# Altium PCB PCB1.PcbDoc
Units mm, origin at the board's own origin, x right, y up, seen from the top; angles counter-clockwise.
Board outline 20.16 x 24.36 mm, 12 copper layers (Top Layer, Mid-Layer 1, Mid-Layer 2, Mid-Layer 3, Mid-Layer 4, Mid-Layer 5, Mid-Layer 6, Mid-Layer 7, Mid-Layer 8, Mid-Layer 9, Mid-Layer 10, Bottom Layer), stack 2.187 mm thick; 1 components, 1 nets, 6 pads, 165 vias.
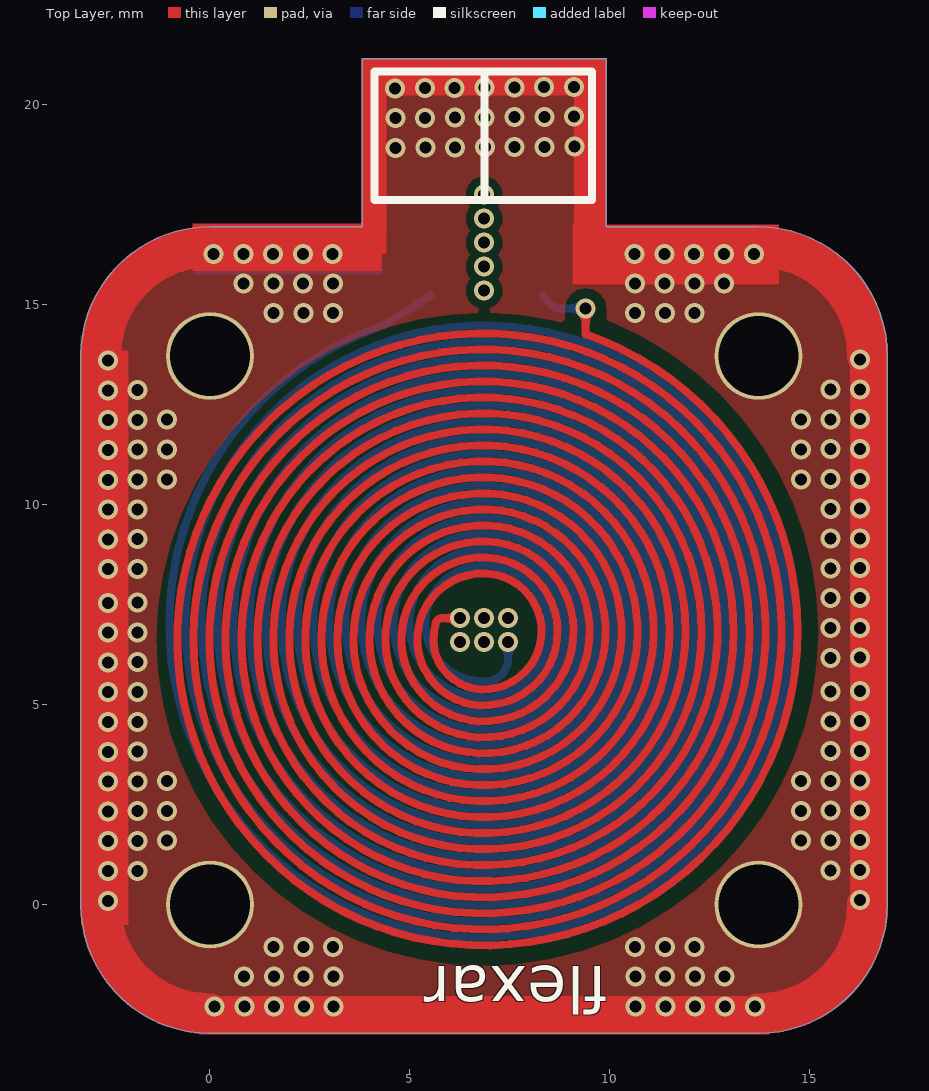
[diagram p0: Top Layer view]
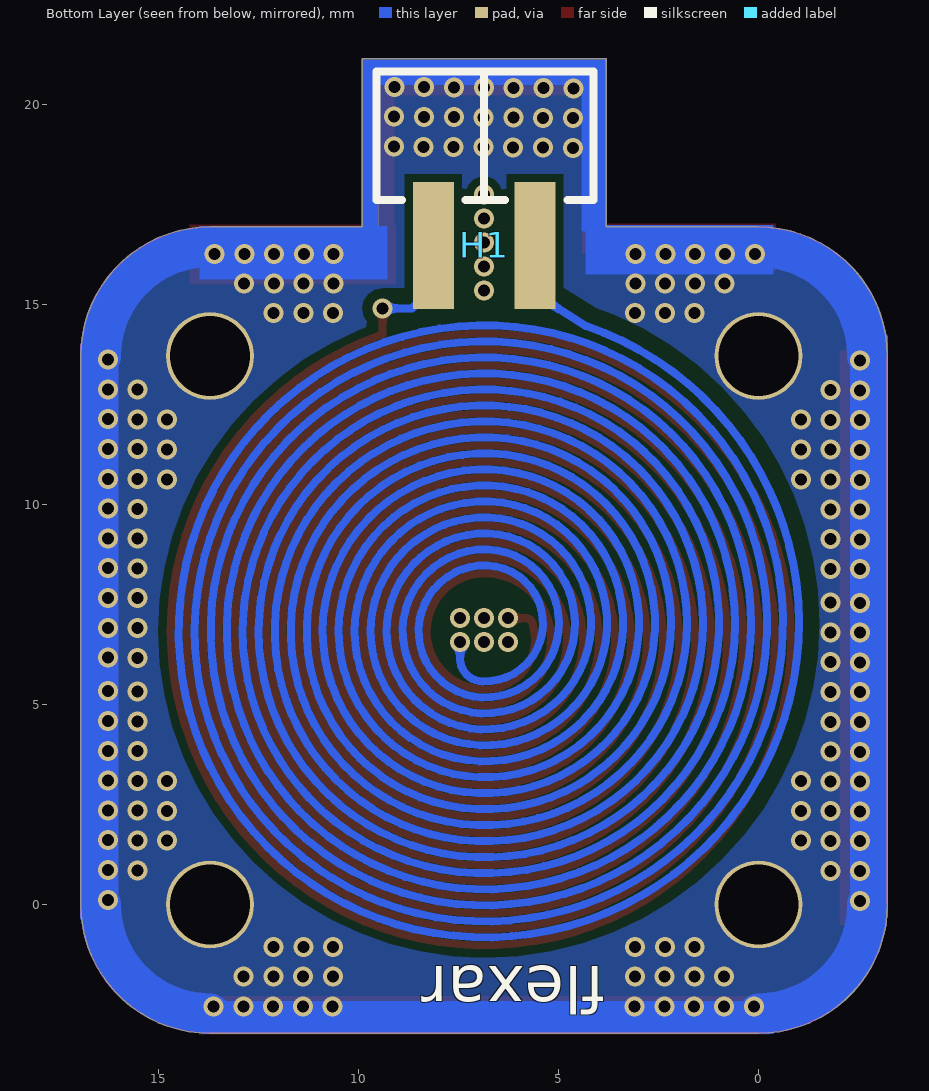
[diagram p1: Bottom Layer view, seen from below]
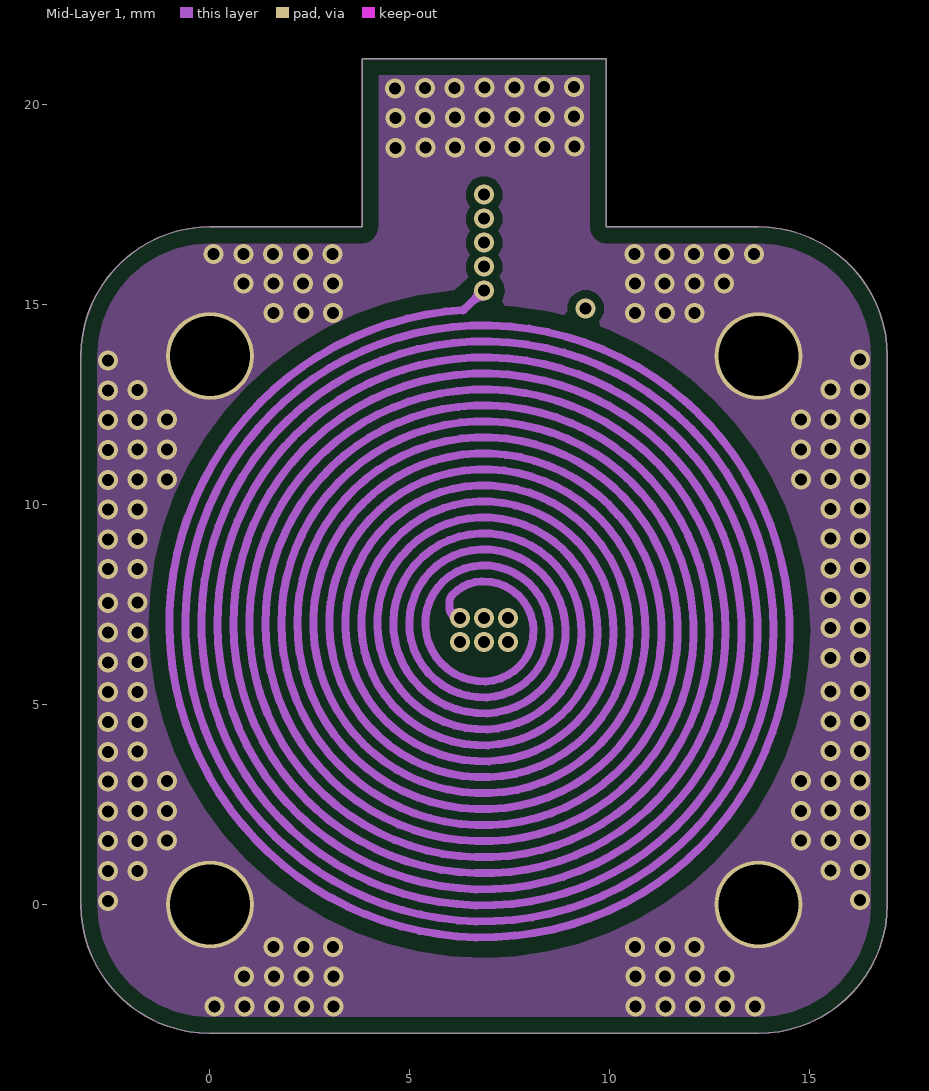
[diagram p2: Mid-Layer 1]
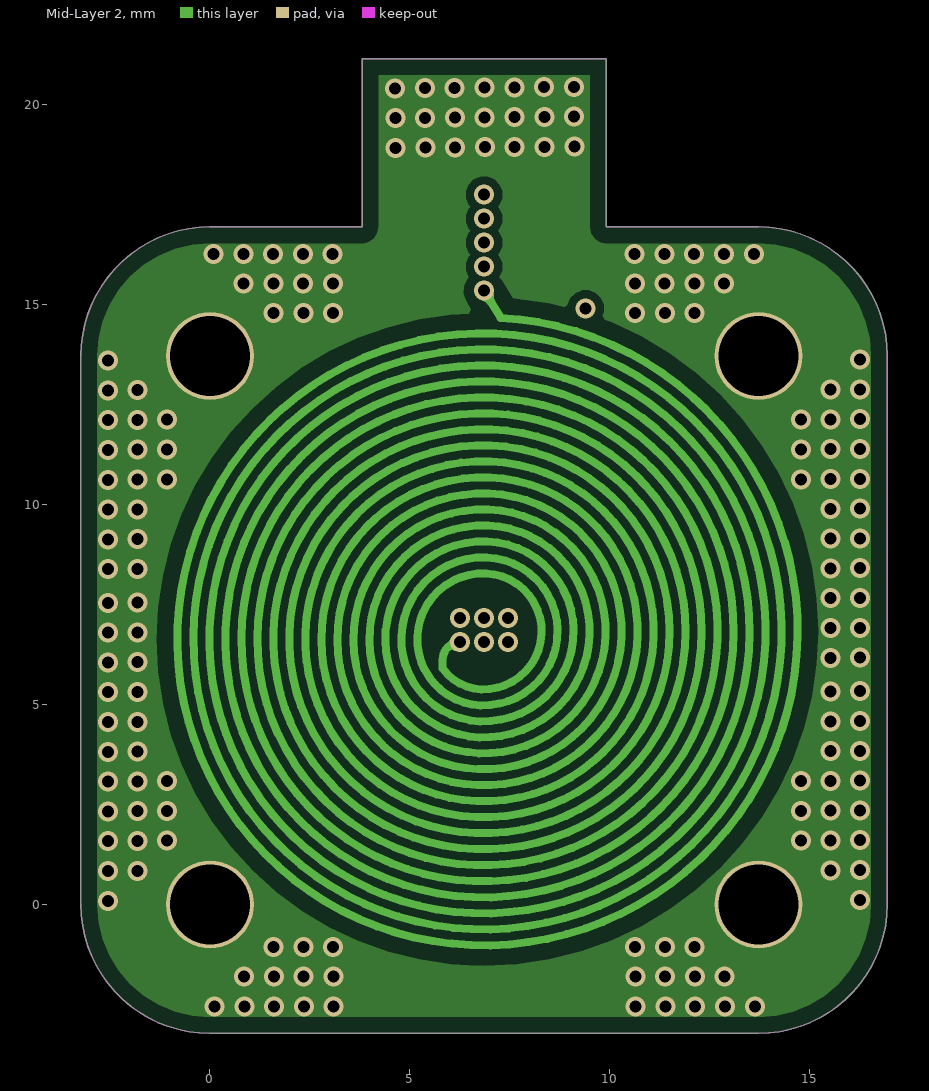
[diagram p3: Mid-Layer 2]
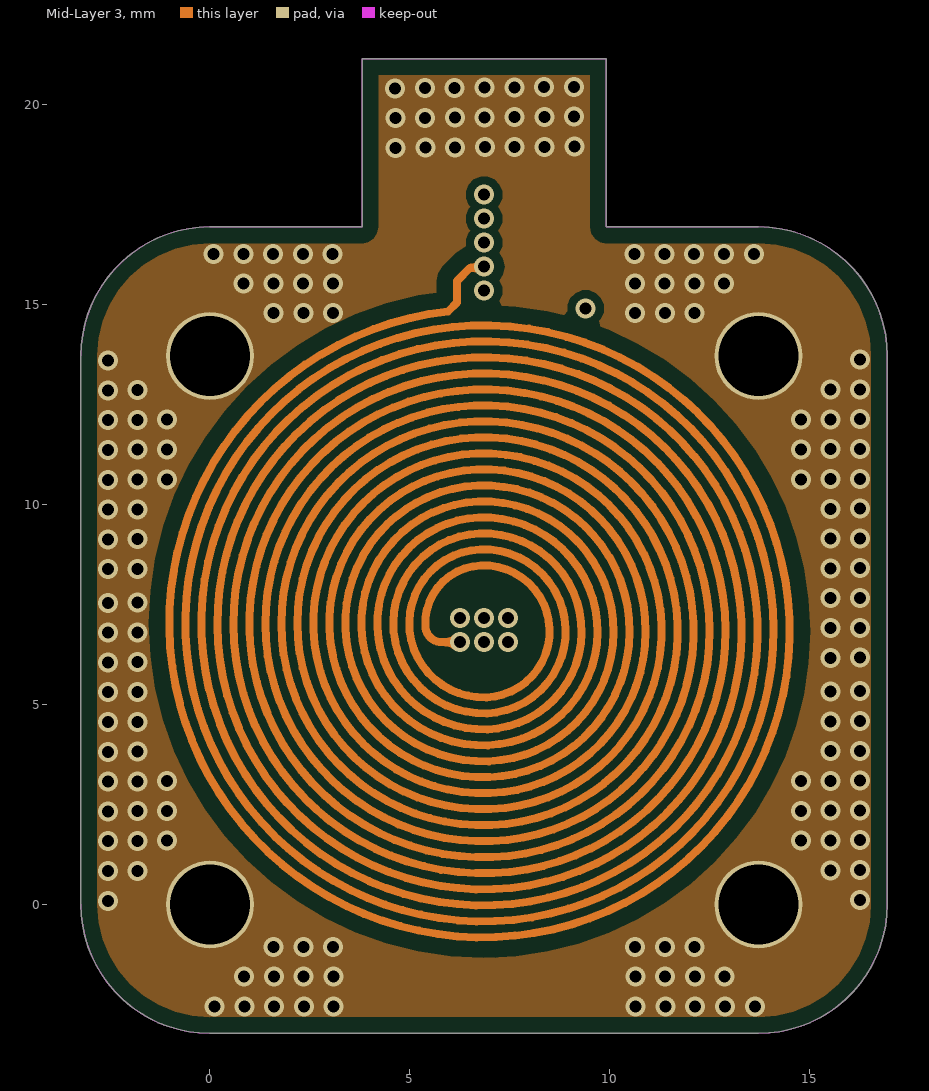
[diagram p4: Mid-Layer 3]
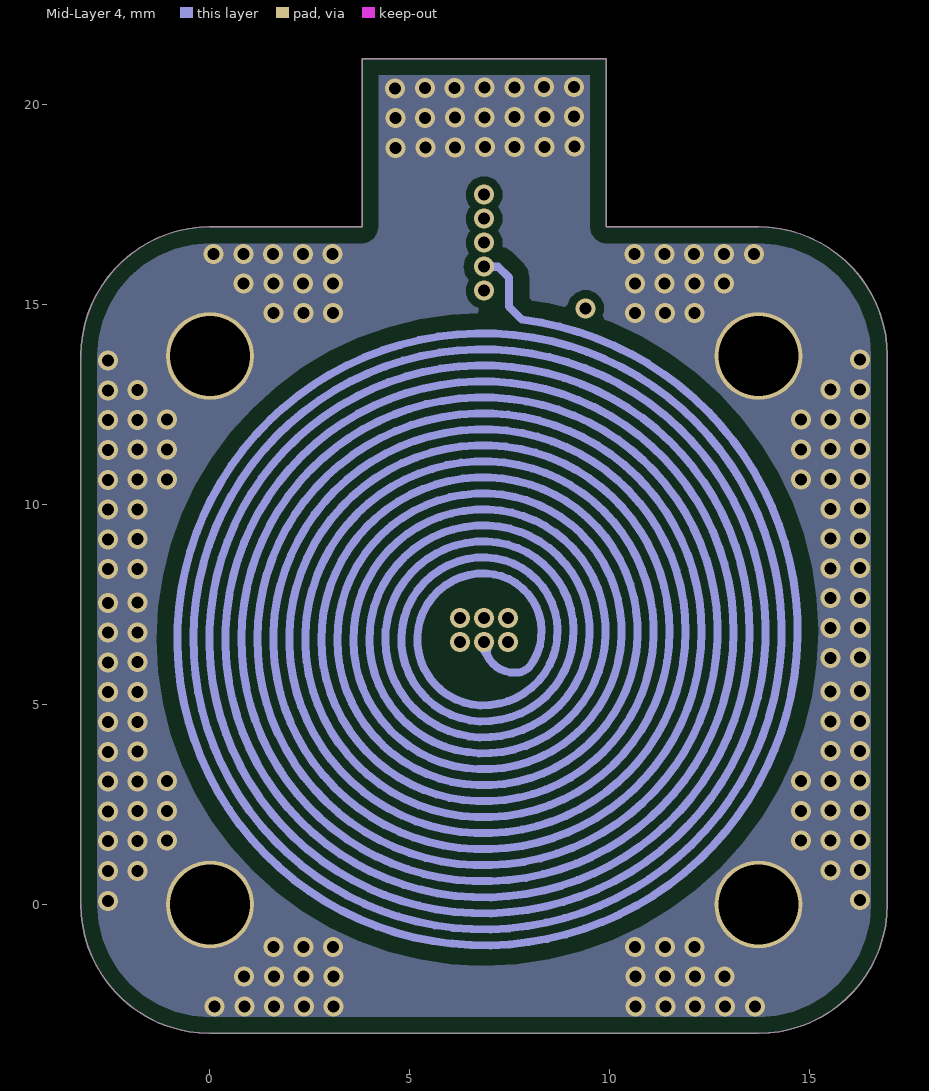
[diagram p5: Mid-Layer 4]
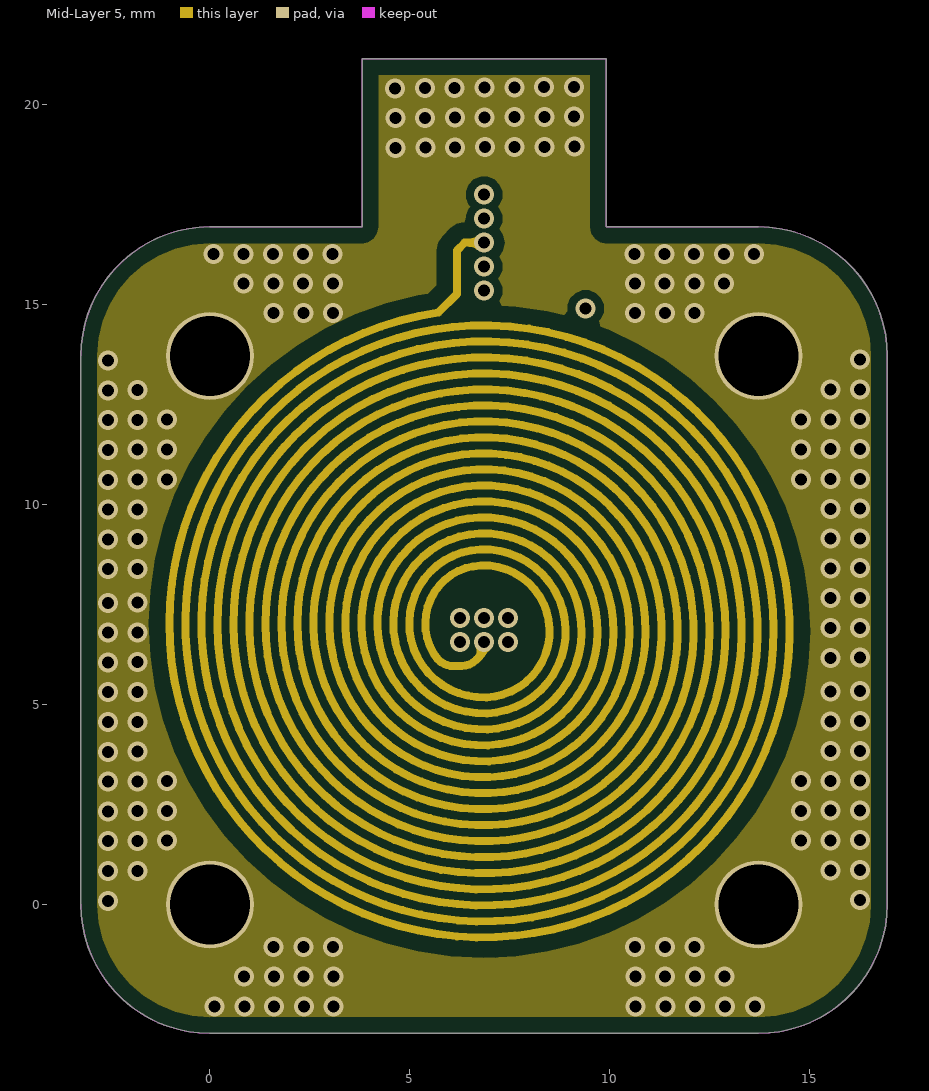
[diagram p6: Mid-Layer 5]
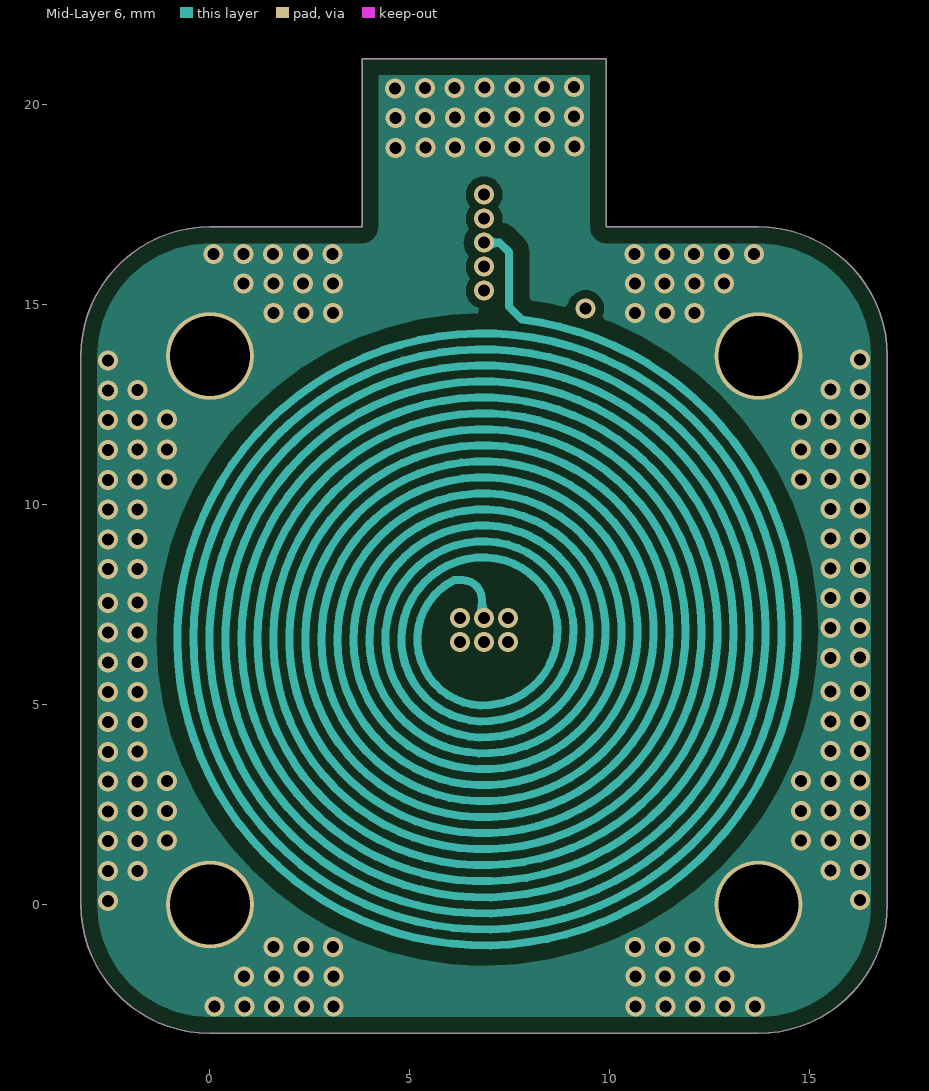
[diagram p7: Mid-Layer 6]
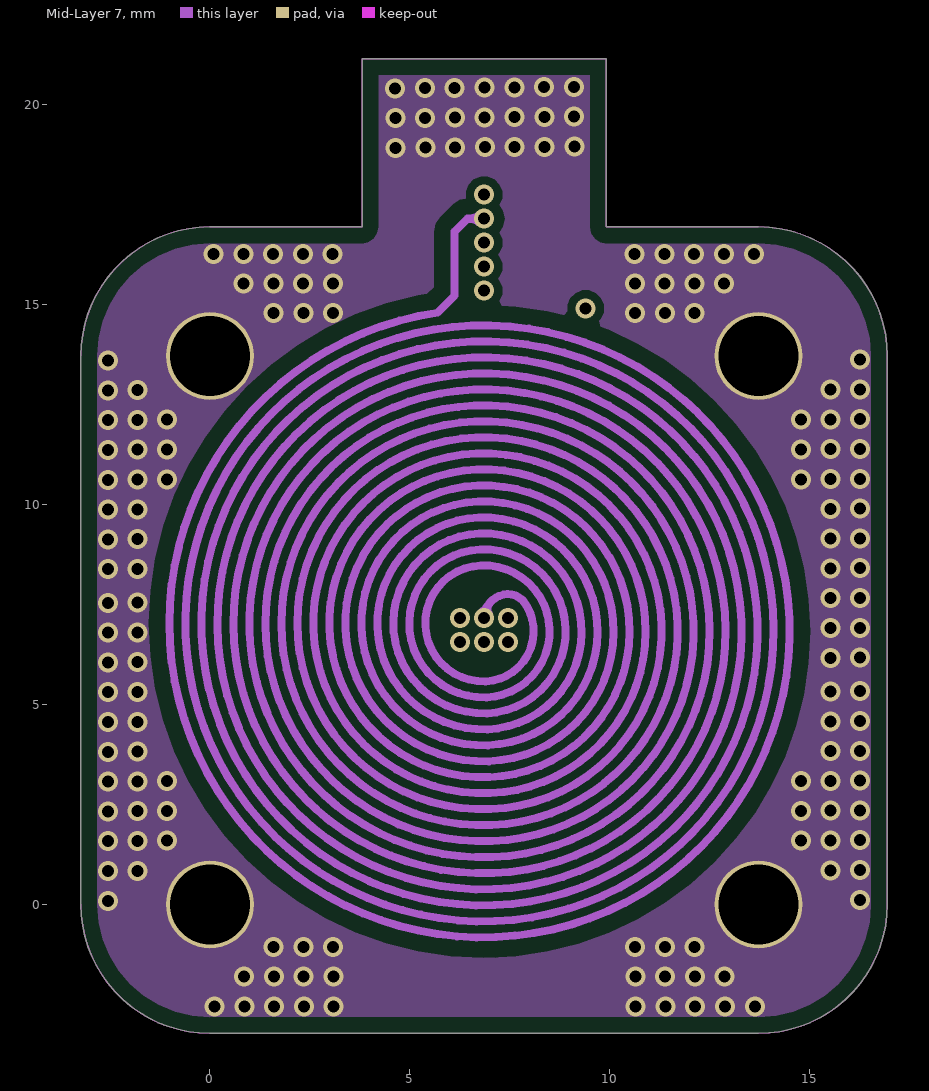
[diagram p8: Mid-Layer 7]
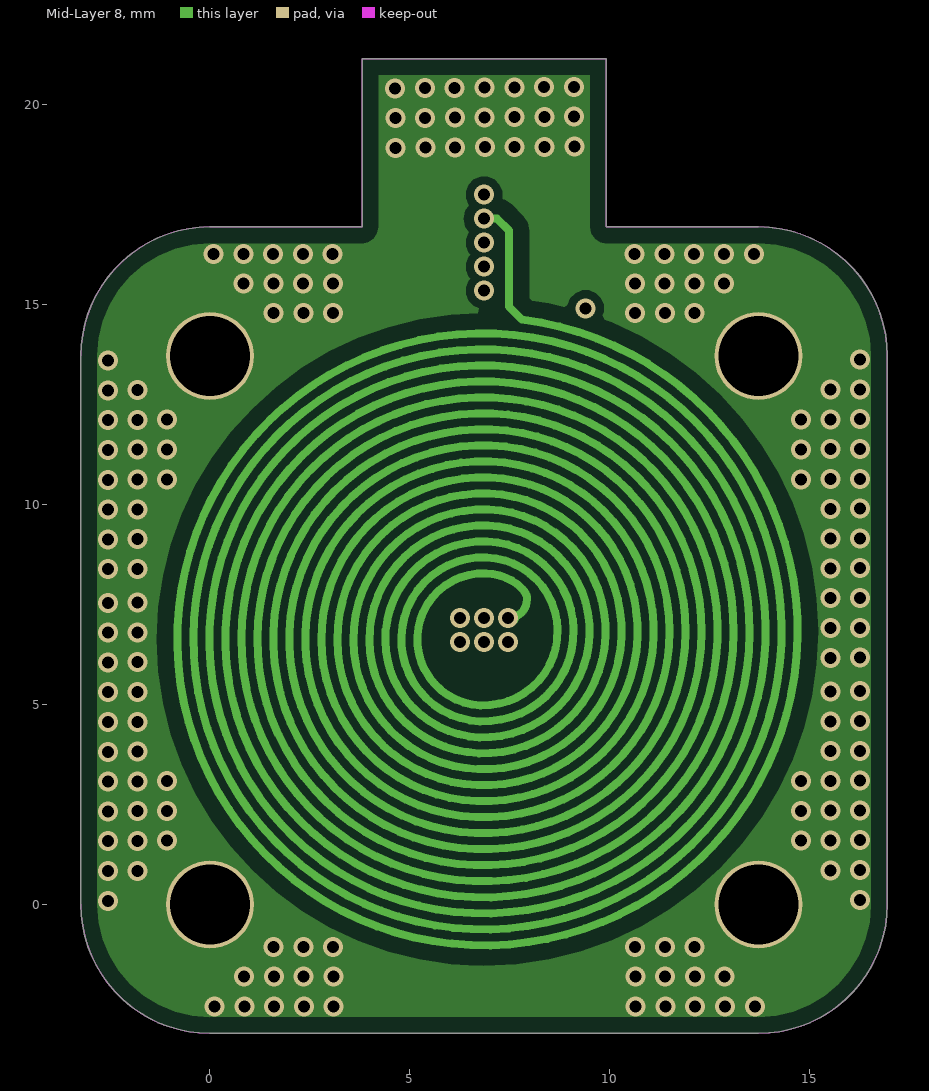
[diagram p9: Mid-Layer 8]
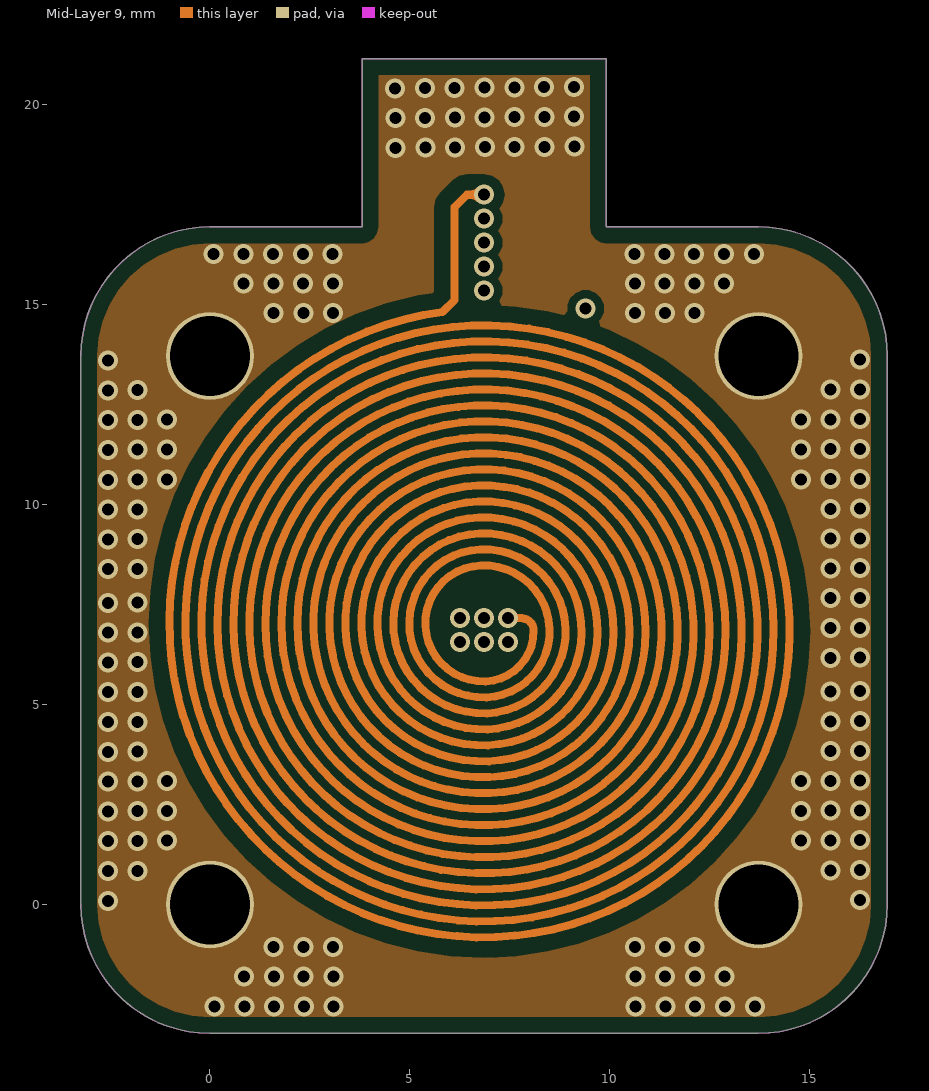
[diagram p10: Mid-Layer 9]
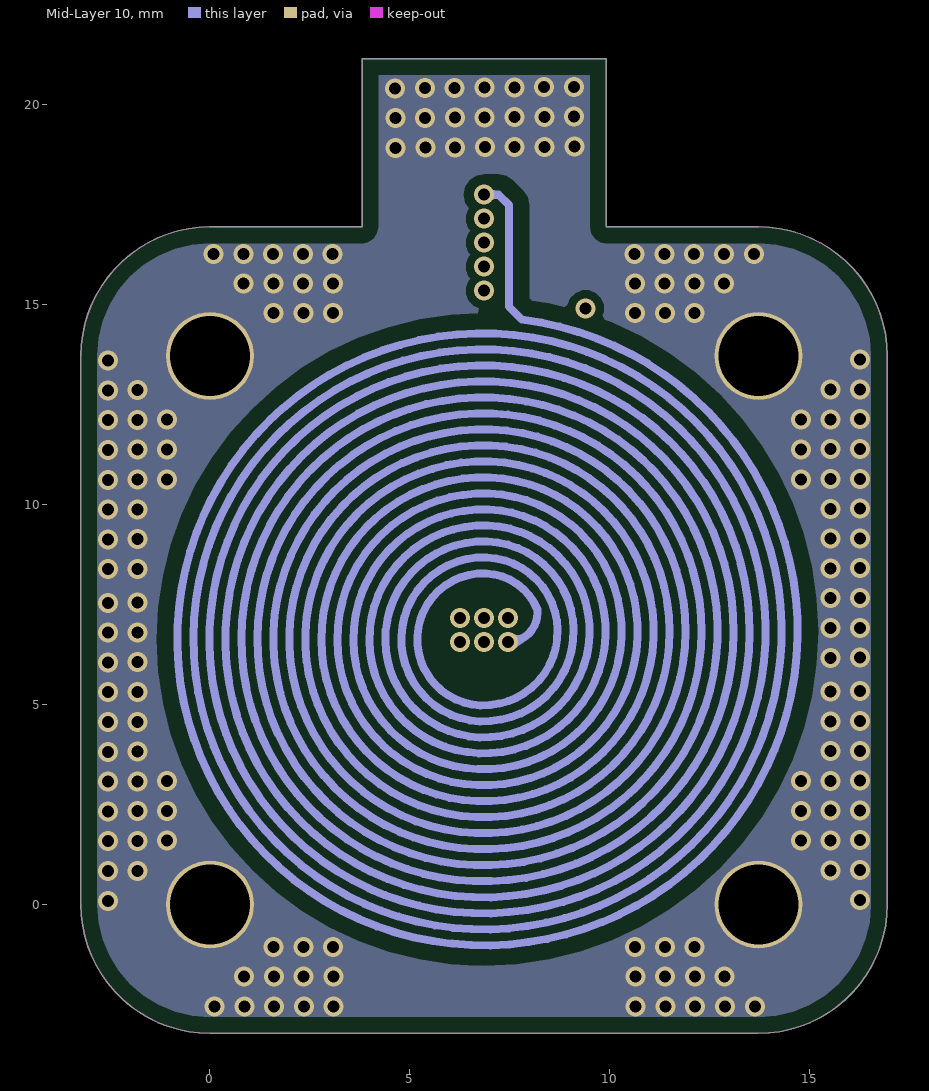
[diagram p11: Mid-Layer 10]

## Layer stack, top to bottom
Top Solder: solder mask 0.0102, Solder Resist, Dk 3.5
Top Layer: signal copper 0.0356
Dielectric 1: dielectric 0.16, FR-4, Dk 4.8
Mid-Layer 1: signal copper 0.0356
Dielectric3: dielectric 0.16, FR-4, Dk 4.8
Mid-Layer 2: signal copper 0.0356
Dielectric6: dielectric 0.16, FR-4, Dk 4.8
Mid-Layer 3: signal copper 0.0356
Dielectric7: dielectric 0.16, FR-4, Dk 4.8
Mid-Layer 4: signal copper 0.0356
Dielectric10: dielectric 0.16, FR-4, Dk 4.8
Mid-Layer 5: signal copper 0.0356
Dielectric8: dielectric 0.16, FR-4, Dk 4.8
Mid-Layer 6: signal copper 0.0356
Dielectric9: dielectric 0.16, FR-4, Dk 4.8
Mid-Layer 7: signal copper 0.0356
Dielectric11: dielectric 0.16, FR-4, Dk 4.8
Mid-Layer 8: signal copper 0.0356
Dielectric2: dielectric 0.16, FR-4, Dk 4.8
Mid-Layer 9: signal copper 0.0356
Dielectric4: dielectric 0.16, FR-4, Dk 4.8
Mid-Layer 10: signal copper 0.0356
Dielectric5: dielectric 0.16, FR-4, Dk 4.8
Bottom Layer: signal copper 0.0356
Bottom Solder: solder mask 0.0102, Solder Resist, Dk 3.5

## Board outline
-3.224,0 -3.224,13.713 cw(c0,13.713) 0,16.937 3.805,16.937 3.805,21.138 9.907,21.138 9.907,16.937 13.713,16.937 cw(c13.713,13.713) 16.937,13.713 16.937,0 cw(c13.713,0) 13.713,-3.224 0,-3.224 cw(c0,0)

## Design rules (kind name [scope] priority, off if disabled: settings)
Clearance [All] p1: gap=0.2 ignorepadtopadclearanceinfootprint=FALSE except(0.4: Arc-Fill Arc-Poly Arc-Region Track-Fill Track-Poly Track-Region)
PlaneConnect [All] p1: planeconnectstyle=Direct reliefexpansion=0.508 reliefentries=4 reliefconductorwidth=0.254 reliefairgap=0.254
PolygonConnect [All] p1: connectstyle=Direct reliefconductorwidth=0.254 reliefentries=4 polygonreliefangle="90 Angle" airgapwidth=0.254
RoutingVias [All] p1: holewidth=0.711 width=1.27 viastyle="Through Hole" minholewidth=0.711 minwidth=1.27 maxholewidth=0.711 maxwidth=1.27
SolderMaskExpansion [All] p1: expansion=0 istentingtop=FALSE
Width [All] p1: maxlimit=1 minlimit=0.2 preferedwidth=0.2
29 further rules are at their usual default settings.

## Components (designator, comment, footprint, x,y, rotation, side; value= is the part's Value field where it differs from the comment)
H1 "H2P2.54" M20-8890245R 7.473,14.168 r180 bottom

## Footprints (in the part's own frame and the unit in brackets; to place one, negate y for a bottom-side part, rotate by r counter-clockwise, add the part's x,y. Pads: shape width x height; smd on the part's side, far side on the other; paste and mask are expansions set on the pad)
M20-8890245R [mm]
  rect 1.02x3.17 smd: 1(-0.653,2.307) 2(1.887,2.307)
  body extent -1.92,0.84 3.16,12.34, height 2.5

## Free pads (board coordinates)
  round 2.2 hole 2: ""(0,0) ""(0,13.713) ""(13.713,0) ""(13.713,13.713)

## Via types
v1: diameter 0.5, hole 0.3, Top Layer to Bottom Layer, tented both sides, 165 vias

## Nets (pads, with @x,y where several pads share a name; then routed paths per layer and width w, separated by ;. In a path a pad name is that pad's centre, name@x,y a point inside that pad or via, vN(x,y) a via of type N, cw(c..) or ccw(c..) an arc to the next point about the centre after c; other vN are vias at no path point)
GND: pad. | length 29.9
  Top Layer w1: v1@-2.72,0 ccw(c0,0) v1@0,-2.72 ; v1@-2.72,13.713 cw(c0,13.713) v1@0,16.433 ; v1@13.713,-2.72 ccw(c13.713,0) v1@16.433,0 ; v1@13.713,16.433 cw(c13.713,13.713) v1@16.433,13.713
  Bottom Layer w1: v1@-2.72,0 ccw(c0,0) v1@0,-2.72 ; v1@13.713,-2.72 ccw(c13.713,0) v1@16.433,0 ; v1@13.713,16.433 cw(c13.713,13.713) v1@16.433,13.713
  other v1: 0.116,-2.546 0.861,-2.546 1.606,-2.546 2.351,-2.546 3.096,-2.546 10.642,-2.546 11.387,-2.546 12.132,-2.546 12.877,-2.546 13.622,-2.546 0.854,-1.807 1.599,-1.807 2.344,-1.807 3.089,-1.807 10.636,-1.807 11.381,-1.807 12.126,-1.807 12.871,-1.807 1.593,-1.067 2.338,-1.067 3.083,-1.067 10.63,-1.067 11.375,-1.067 12.12,-1.067 -2.546,0.091 16.259,0.116 -2.546,0.836 -1.807,0.842 15.519,0.854 16.259,0.861 -2.546,1.581 -1.807,1.587 -1.067,1.593 14.78,1.593 15.519,1.599 16.259,1.606 -2.546,2.326 -1.807,2.332 -1.067,2.338 14.78,2.338 15.519,2.344 16.259,2.351 -2.546,3.071 -1.807,3.077 -1.067,3.083 14.78,3.083 15.519,3.089 16.259,3.096 -2.546,3.816 -1.807,3.822 15.519,3.834 16.259,3.841 -2.546,4.561 -1.807,4.567 15.519,4.579 16.259,4.586 -2.546,5.306 -1.807,5.312 15.519,5.324 16.259,5.331 -2.546,6.051 -1.807,6.057 15.519,6.166 16.259,6.172 -2.546,6.796 -1.807,6.802 15.519,6.911 16.259,6.917 -2.546,7.541 -1.807,7.547 15.519,7.656 16.259,7.662 -2.546,8.382 -1.807,8.388 15.519,8.401 16.259,8.407 -2.546,9.127 -1.807,9.133 15.519,9.146 16.259,9.152 -2.546,9.872 -1.807,9.878 15.519,9.891 16.259,9.897 -2.546,10.617 -1.807,10.623 -1.067,10.63 14.78,10.63 15.519,10.636 16.259,10.642 -2.546,11.362 -1.807,11.368 -1.067,11.375 14.78,11.375 15.519,11.381 16.259,11.387 -2.546,12.107 -1.807,12.113 -1.067,12.12 14.78,12.12 15.519,12.126 16.259,12.132 -2.546,12.852 -1.807,12.858 15.519,12.871 16.259,12.877 -2.546,13.597 16.259,13.622 1.593,14.78 2.338,14.78 3.083,14.78 10.63,14.78 11.375,14.78 12.12,14.78 0.842,15.519 1.587,15.519 2.332,15.519 3.077,15.519 10.623,15.519 11.368,15.519 12.113,15.519 12.858,15.519 0.091,16.259 0.836,16.259 1.581,16.259 2.326,16.259 3.071,16.259 10.617,16.259 11.362,16.259 12.107,16.259 12.852,16.259 13.597,16.259 4.641,18.913 5.386,18.919 6.131,18.925 6.876,18.931 7.622,18.937 8.367,18.943 9.112,18.949 4.635,19.658 5.38,19.664 6.125,19.67 6.87,19.676 7.616,19.682 8.361,19.688 9.106,19.694 4.629,20.403 5.374,20.409 6.119,20.415 6.864,20.421 7.61,20.427 8.355,20.433 9.1,20.439
pads on no net: H1.1 H1.2
copper on no net: | length 5839.7
  Top Layer w0.2: v1(6.256,7.156) 5.809,7.156 ccw(c5.809,6.985) 5.638,6.985 ccw(c6.835,6.628) 6.786,5.379 ccw(c6.843,6.828) 6.901,8.276 ccw(c6.835,6.628) 6.77,4.979 ccw(c6.843,6.828) 6.917,8.676 ccw(c6.835,6.628) 6.754,4.579 ccw(c6.843,6.828) 6.933,9.076 ccw(c6.835,6.628) 6.738,4.18 ccw(c6.843,6.828) 6.949,9.475 ccw(c6.835,6.628) 6.722,3.78 ccw(c6.843,6.828) 6.965,9.875 ccw(c6.835,6.628) 6.706,3.38 ccw(c6.843,6.828) 6.981,10.275 ccw(c6.835,6.628) 6.69,2.981 ccw(c6.843,6.828) 6.997,10.675 ccw(c6.835,6.628) 6.674,2.581 ccw(c6.843,6.828) 7.013,11.074 ccw(c6.835,6.628) 6.658,2.181 ccw(c6.843,6.828) 7.029,11.474 ccw(c6.835,6.628) 6.642,1.782 ccw(c6.843,6.828) 7.045,11.874 ccw(c6.835,6.628) 6.626,1.382 ccw(c6.843,6.828) 7.061,12.273 ccw(c6.835,6.628) 6.61,0.982 ccw(c6.843,6.828) 7.077,12.673 ccw(c6.835,6.628) 6.594,0.583 ccw(c6.843,6.828) 7.093,13.073 ccw(c6.835,6.628) 6.578,0.183 ccw(c6.843,6.828) 7.109,13.472 ccw(c6.835,6.628) 6.562,-0.217 ccw(c6.843,6.828) 7.125,13.872 ccw(c6.835,6.628) 6.546,-0.616 ccw(c6.843,6.828) 7.141,14.272 ccw(c6.835,6.628) 6.53,-1.016 ccw(c6.843,6.828) 9.396,14.251 v1(9.396,14.9)
  Mid-Layer 1 w0.2: v1(6.256,7.156) cw(c6.256,7.423) 5.99,7.423 5.99,7.551 cw(c6.269,7.551) 6.072,7.748 cw(c6.835,7.027) 6.794,8.077 ; 6.319,14.846 v1(6.856,15.344) ; 6.355,14.863 ccw(c6.835,7.027) 7.149,-0.816 ccw(c6.843,6.828) 6.538,14.471 ccw(c6.835,7.027) 7.133,-0.417 ccw(c6.843,6.828) 6.554,14.072 ccw(c6.835,7.027) 7.117,-0.017 ccw(c6.843,6.828) 6.57,13.672 ccw(c6.835,7.027) 7.101,0.383 ccw(c6.843,6.828) 6.586,13.272 ccw(c6.835,7.027) 7.085,0.782 ccw(c6.843,6.828) 6.602,12.873 ccw(c6.835,7.027) 7.069,1.182 ccw(c6.843,6.828) 6.618,12.473 ccw(c6.835,7.027) 7.053,1.582 ccw(c6.843,6.828) 6.634,12.073 ccw(c6.835,7.027) 7.037,1.981 ccw(c6.843,6.828) 6.65,11.674 ccw(c6.835,7.027) 7.021,2.381 ccw(c6.843,6.828) 6.666,11.274 ccw(c6.835,7.027) 7.005,2.781 ccw(c6.843,6.828) 6.682,10.874 ccw(c6.835,7.027) 6.989,3.181 ccw(c6.843,6.828) 6.698,10.475 ccw(c6.835,7.027) 6.973,3.58 ccw(c6.843,6.828) 6.714,10.075 ccw(c6.835,7.027) 6.957,3.98 ccw(c6.843,6.828) 6.73,9.675 ccw(c6.835,7.027) 6.941,4.38 ccw(c6.843,6.828) 6.746,9.276 ccw(c6.835,7.027) 6.925,4.779 ccw(c6.843,6.828) 6.762,8.876 ccw(c6.835,7.027) 6.909,5.179 ccw(c6.843,6.828) 6.778,8.476 ; 6.83,8.078 cw(c6.843,6.828) 6.893,5.579 ; 6.778,8.476 ccw(c6.835,7.027) 6.893,5.579 ; 6.778,8.476 ccw(c6.835,7.027) 6.893,5.579 ; 6.778,8.476 ccw(c6.835,7.027) 6.893,5.579
  Mid-Layer 2 w0.2: v1(6.256,6.556) ccw(c6.256,6.121) 5.821,6.121 5.821,5.897 ccw(c6.835,6.628) 6.786,5.379 ; v1(6.856,15.344) 7.261,14.677 ; 7.261,14.666 cw(c6.843,6.828) 6.53,-1.016 cw(c6.835,6.628) 7.141,14.272 cw(c6.843,6.828) 6.546,-0.616 cw(c6.835,6.628) 7.125,13.872 cw(c6.843,6.828) 6.562,-0.217 cw(c6.835,6.628) 7.109,13.472 cw(c6.843,6.828) 6.578,0.183 cw(c6.835,6.628) 7.093,13.073 cw(c6.843,6.828) 6.594,0.583 cw(c6.835,6.628) 7.077,12.673 cw(c6.843,6.828) 6.61,0.982 cw(c6.835,6.628) 7.061,12.273 cw(c6.843,6.828) 6.626,1.382 cw(c6.835,6.628) 7.045,11.874 cw(c6.843,6.828) 6.642,1.782 cw(c6.835,6.628) 7.029,11.474 cw(c6.843,6.828) 6.658,2.181 cw(c6.835,6.628) 7.013,11.074 cw(c6.843,6.828) 6.674,2.581 cw(c6.835,6.628) 6.997,10.675 cw(c6.843,6.828) 6.69,2.981 cw(c6.835,6.628) 6.981,10.275 cw(c6.843,6.828) 6.706,3.38 cw(c6.835,6.628) 6.965,9.875 cw(c6.843,6.828) 6.722,3.78 cw(c6.835,6.628) 6.949,9.475 cw(c6.843,6.828) 6.738,4.18 cw(c6.835,6.628) 6.933,9.076 cw(c6.843,6.828) 6.754,4.579 cw(c6.835,6.628) 6.917,8.676 cw(c6.843,6.828) 6.77,4.979 cw(c6.835,6.628) 6.901,8.276 ; 6.786,5.379 ccw(c6.843,6.828) 6.901,8.276 ; 6.786,5.379 ccw(c6.843,6.828) 6.901,8.276 ; 6.786,5.379 ccw(c6.843,6.828) 6.901,8.276
  Mid-Layer 3 w0.2: v1(6.256,6.556) 5.804,6.556 cw(c5.804,6.974) 5.386,6.974 cw(c6.835,7.027) 6.778,8.476 cw(c6.843,6.828) 6.909,5.179 cw(c6.835,7.027) 6.762,8.876 cw(c6.843,6.828) 6.925,4.779 cw(c6.835,7.027) 6.746,9.276 cw(c6.843,6.828) 6.941,4.38 cw(c6.835,7.027) 6.73,9.675 cw(c6.843,6.828) 6.957,3.98 cw(c6.835,7.027) 6.714,10.075 cw(c6.843,6.828) 6.973,3.58 cw(c6.835,7.027) 6.698,10.475 cw(c6.843,6.828) 6.989,3.181 cw(c6.835,7.027) 6.682,10.874 cw(c6.843,6.828) 7.005,2.781 cw(c6.835,7.027) 6.666,11.274 cw(c6.843,6.828) 7.021,2.381 cw(c6.835,7.027) 6.65,11.674 cw(c6.843,6.828) 7.037,1.981 cw(c6.835,7.027) 6.634,12.073 cw(c6.843,6.828) 7.053,1.582 cw(c6.835,7.027) 6.618,12.473 cw(c6.843,6.828) 7.069,1.182 cw(c6.835,7.027) 6.602,12.873 cw(c6.843,6.828) 7.085,0.782 cw(c6.835,7.027) 6.586,13.272 cw(c6.843,6.828) 7.101,0.383 cw(c6.835,7.027) 6.57,13.672 cw(c6.843,6.828) 7.117,-0.017 cw(c6.835,7.027) 6.554,14.072 cw(c6.843,6.828) 7.133,-0.417 cw(c6.835,7.027) 6.538,14.471 cw(c6.843,6.828) 7.149,-0.816 cw(c6.835,7.027) 5.959,14.828 6.178,15.047 6.178,15.589 6.506,15.917 6.83,15.917 v1(6.856,15.944)
  Mid-Layer 4 w0.2: v1(6.856,6.556) ccw(c7.62,6.556) 7.62,5.793 7.649,5.793 ccw(c7.649,6.268) 7.984,5.932 ccw(c6.843,6.828) 6.901,8.276 ccw(c6.835,6.628) 6.77,4.979 ccw(c6.843,6.828) 6.917,8.676 ccw(c6.835,6.628) 6.754,4.579 ccw(c6.843,6.828) 6.933,9.076 ccw(c6.835,6.628) 6.738,4.18 ccw(c6.843,6.828) 6.949,9.475 ccw(c6.835,6.628) 6.722,3.78 ccw(c6.843,6.828) 6.965,9.875 ccw(c6.835,6.628) 6.706,3.38 ccw(c6.843,6.828) 6.981,10.275 ccw(c6.835,6.628) 6.69,2.981 ccw(c6.843,6.828) 6.997,10.675 ccw(c6.835,6.628) 6.674,2.581 ccw(c6.843,6.828) 7.013,11.074 ccw(c6.835,6.628) 6.658,2.181 ccw(c6.843,6.828) 7.029,11.474 ccw(c6.835,6.628) 6.642,1.782 ccw(c6.843,6.828) 7.045,11.874 ccw(c6.835,6.628) 6.626,1.382 ccw(c6.843,6.828) 7.061,12.273 ccw(c6.835,6.628) 6.61,0.982 ccw(c6.843,6.828) 7.077,12.673 ccw(c6.835,6.628) 6.594,0.583 ccw(c6.843,6.828) 7.093,13.073 ccw(c6.835,6.628) 6.578,0.183 ccw(c6.843,6.828) 7.109,13.472 ccw(c6.835,6.628) 6.562,-0.217 ccw(c6.843,6.828) 7.125,13.872 ccw(c6.835,6.628) 6.546,-0.616 ccw(c6.843,6.828) 7.141,14.272 ccw(c6.835,6.628) 6.53,-1.016 ccw(c6.843,6.828) 7.8,14.619 7.475,14.944 7.475,15.671 7.202,15.944 v1(6.856,15.944)
  Mid-Layer 5 w0.2: v1(6.856,6.556) cw(c6.256,6.556) 6.294,5.958 6.103,5.958 cw(c6.103,6.525) 5.701,6.124 cw(c6.835,7.027) 6.778,8.476 cw(c6.843,6.828) 6.909,5.179 cw(c6.835,7.027) 6.762,8.876 cw(c6.843,6.828) 6.925,4.779 cw(c6.835,7.027) 6.746,9.276 cw(c6.843,6.828) 6.941,4.38 cw(c6.835,7.027) 6.73,9.675 cw(c6.843,6.828) 6.957,3.98 cw(c6.835,7.027) 6.714,10.075 cw(c6.843,6.828) 6.973,3.58 cw(c6.835,7.027) 6.698,10.475 cw(c6.843,6.828) 6.989,3.181 cw(c6.835,7.027) 6.682,10.874 cw(c6.843,6.828) 7.005,2.781 cw(c6.835,7.027) 6.666,11.274 cw(c6.843,6.828) 7.021,2.381 cw(c6.835,7.027) 6.65,11.674 cw(c6.843,6.828) 7.037,1.981 cw(c6.835,7.027) 6.634,12.073 cw(c6.843,6.828) 7.053,1.582 cw(c6.835,7.027) 6.618,12.473 cw(c6.843,6.828) 7.069,1.182 cw(c6.835,7.027) 6.602,12.873 cw(c6.843,6.828) 7.085,0.782 cw(c6.835,7.027) 6.586,13.272 cw(c6.843,6.828) 7.101,0.383 cw(c6.835,7.027) 6.57,13.672 cw(c6.843,6.828) 7.117,-0.017 cw(c6.835,7.027) 6.554,14.072 cw(c6.843,6.828) 7.133,-0.417 cw(c6.835,7.027) 6.538,14.471 cw(c6.843,6.828) 7.149,-0.816 cw(c6.835,7.027) 5.711,14.797 6.178,15.263 6.178,16.351 6.37,16.544 v1(6.856,16.544)
  Mid-Layer 6 w0.2: v1@6.802,7.211 6.802,7.614 ccw(c6.306,7.614) 6.306,8.11 6.111,8.11 ccw(c6.835,6.628) 6.77,4.979 ; v1(6.856,16.544) 7.241,16.544 7.475,16.309 7.475,14.944 7.8,14.619 cw(c6.843,6.828) 6.53,-1.016 cw(c6.835,6.628) 7.141,14.272 cw(c6.843,6.828) 6.546,-0.616 cw(c6.835,6.628) 7.125,13.872 cw(c6.843,6.828) 6.562,-0.217 cw(c6.835,6.628) 7.109,13.472 cw(c6.843,6.828) 6.578,0.183 cw(c6.835,6.628) 7.093,13.073 cw(c6.843,6.828) 6.594,0.583 cw(c6.835,6.628) 7.077,12.673 cw(c6.843,6.828) 6.61,0.982 cw(c6.835,6.628) 7.061,12.273 cw(c6.843,6.828) 6.626,1.382 cw(c6.835,6.628) 7.045,11.874 cw(c6.843,6.828) 6.642,1.782 cw(c6.835,6.628) 7.029,11.474 cw(c6.843,6.828) 6.658,2.181 cw(c6.835,6.628) 7.013,11.074 cw(c6.843,6.828) 6.674,2.581 cw(c6.835,6.628) 6.997,10.675 cw(c6.843,6.828) 6.69,2.981 cw(c6.835,6.628) 6.981,10.275 cw(c6.843,6.828) 6.706,3.38 cw(c6.835,6.628) 6.965,9.875 cw(c6.843,6.828) 6.722,3.78 cw(c6.835,6.628) 6.949,9.475 cw(c6.843,6.828) 6.738,4.18 cw(c6.835,6.628) 6.933,9.076 cw(c6.843,6.828) 6.754,4.579 cw(c6.835,6.628) 6.917,8.676 ; 6.77,4.979 ccw(c6.843,6.828) 6.917,8.676 ; 6.77,4.979 ccw(c6.843,6.828) 6.917,8.676
  Mid-Layer 6 w0.254: v1@6.802,7.211 ccw(c6.856,7.211) v1(6.856,7.156)
  Mid-Layer 7 w0.2: v1(6.856,7.156) cw(c7.456,7.156) 7.646,7.726 7.816,7.613 cw(c6.843,6.828) 6.893,5.579 cw(c6.835,7.027) 6.778,8.476 cw(c6.843,6.828) 6.909,5.179 cw(c6.835,7.027) 6.762,8.876 cw(c6.843,6.828) 6.925,4.779 cw(c6.835,7.027) 6.746,9.276 cw(c6.843,6.828) 6.941,4.38 cw(c6.835,7.027) 6.73,9.675 cw(c6.843,6.828) 6.957,3.98 cw(c6.835,7.027) 6.714,10.075 cw(c6.843,6.828) 6.973,3.58 cw(c6.835,7.027) 6.698,10.475 cw(c6.843,6.828) 6.989,3.181 cw(c6.835,7.027) 6.682,10.874 cw(c6.843,6.828) 7.005,2.781 cw(c6.835,7.027) 6.666,11.274 cw(c6.843,6.828) 7.021,2.381 cw(c6.835,7.027) 6.65,11.674 cw(c6.843,6.828) 7.037,1.981 cw(c6.835,7.027) 6.634,12.073 cw(c6.843,6.828) 7.053,1.582 cw(c6.835,7.027) 6.618,12.473 cw(c6.843,6.828) 7.069,1.182 cw(c6.835,7.027) 6.602,12.873 cw(c6.843,6.828) 7.085,0.782 cw(c6.835,7.027) 6.586,13.272 cw(c6.843,6.828) 7.101,0.383 cw(c6.835,7.027) 6.57,13.672 cw(c6.843,6.828) 7.117,-0.017 cw(c6.835,7.027) 6.554,14.072 cw(c6.843,6.828) 7.133,-0.417 cw(c6.835,7.027) 6.538,14.471 cw(c6.843,6.828) 7.149,-0.816 cw(c6.835,7.027) 5.693,14.794 6.12,15.221 6.12,16.823 6.44,17.144 v1(6.856,17.144)
  Mid-Layer 8 w0.2: v1(6.856,17.144) 7.18,17.144 7.475,16.849 7.475,14.944 7.8,14.619 cw(c6.843,6.828) 6.53,-1.016 cw(c6.835,6.628) 7.141,14.272 cw(c6.843,6.828) 6.546,-0.616 cw(c6.835,6.628) 7.125,13.872 cw(c6.843,6.828) 6.562,-0.217 cw(c6.835,6.628) 7.109,13.472 cw(c6.843,6.828) 6.578,0.183 cw(c6.835,6.628) 7.093,13.073 cw(c6.843,6.828) 6.594,0.583 cw(c6.835,6.628) 7.077,12.673 cw(c6.843,6.828) 6.61,0.982 cw(c6.835,6.628) 7.061,12.273 cw(c6.843,6.828) 6.626,1.382 cw(c6.835,6.628) 7.045,11.874 cw(c6.843,6.828) 6.642,1.782 cw(c6.835,6.628) 7.029,11.474 cw(c6.843,6.828) 6.658,2.181 cw(c6.835,6.628) 7.013,11.074 cw(c6.843,6.828) 6.674,2.581 cw(c6.835,6.628) 6.997,10.675 cw(c6.843,6.828) 6.69,2.981 cw(c6.835,6.628) 6.981,10.275 cw(c6.843,6.828) 6.706,3.38 cw(c6.835,6.628) 6.965,9.875 cw(c6.843,6.828) 6.722,3.78 cw(c6.835,6.628) 6.949,9.475 cw(c6.843,6.828) 6.738,4.18 cw(c6.835,6.628) 6.933,9.076 cw(c6.843,6.828) 6.754,4.579 cw(c6.835,6.628) 6.917,8.676 cw(c6.843,6.828) 6.77,4.979 cw(c6.835,6.628) 6.901,8.276 cw(c6.843,6.828) 7.695,8.001 7.826,7.87 cw(c7.583,7.627) 7.927,7.627 cw(c7.456,7.627) v1(7.456,7.156)
  Mid-Layer 9 w0.2: v1(6.856,17.744) 6.427,17.744 6.12,17.436 6.12,15.113 5.819,14.811 ccw(c6.835,7.027) 7.149,-0.816 ccw(c6.843,6.828) 6.538,14.471 ccw(c6.835,7.027) 7.133,-0.417 ccw(c6.843,6.828) 6.554,14.072 ccw(c6.835,7.027) 7.117,-0.017 ccw(c6.843,6.828) 6.57,13.672 ccw(c6.835,7.027) 7.101,0.383 ccw(c6.843,6.828) 6.586,13.272 ccw(c6.835,7.027) 7.085,0.782 ccw(c6.843,6.828) 6.602,12.873 ccw(c6.835,7.027) 7.069,1.182 ccw(c6.843,6.828) 6.618,12.473 ccw(c6.835,7.027) 7.053,1.582 ccw(c6.843,6.828) 6.634,12.073 ccw(c6.835,7.027) 7.037,1.981 ccw(c6.843,6.828) 6.65,11.674 ccw(c6.835,7.027) 7.021,2.381 ccw(c6.843,6.828) 6.666,11.274 ccw(c6.835,7.027) 7.005,2.781 ccw(c6.843,6.828) 6.682,10.874 ccw(c6.835,7.027) 6.989,3.181 ccw(c6.843,6.828) 6.698,10.475 ccw(c6.835,7.027) 6.973,3.58 ccw(c6.843,6.828) 6.714,10.075 ccw(c6.835,7.027) 6.957,3.98 ccw(c6.843,6.828) 6.73,9.675 ccw(c6.835,7.027) 6.941,4.38 ccw(c6.843,6.828) 6.746,9.276 ccw(c6.835,7.027) 6.925,4.779 ccw(c6.843,6.828) 6.762,8.876 ccw(c6.835,7.027) 6.909,5.179 ccw(c6.843,6.828) 6.778,8.476 ccw(c6.835,7.027) 6.893,5.579 ccw(c6.843,6.828) 8.093,6.852 ccw(c7.789,6.852) 7.789,7.156 v1(7.456,7.156)
  Mid-Layer 10 w0.2: v1(6.856,17.744) 7.215,17.744 7.475,17.484 7.475,14.944 7.8,14.619 cw(c6.843,6.828) 6.53,-1.016 cw(c6.835,6.628) 7.141,14.272 cw(c6.843,6.828) 6.546,-0.616 cw(c6.835,6.628) 7.125,13.872 cw(c6.843,6.828) 6.562,-0.217 cw(c6.835,6.628) 7.109,13.472 cw(c6.843,6.828) 6.578,0.183 cw(c6.835,6.628) 7.093,13.073 cw(c6.843,6.828) 6.594,0.583 cw(c6.835,6.628) 7.077,12.673 cw(c6.843,6.828) 6.61,0.982 cw(c6.835,6.628) 7.061,12.273 cw(c6.843,6.828) 6.626,1.382 cw(c6.835,6.628) 7.045,11.874 cw(c6.843,6.828) 6.642,1.782 cw(c6.835,6.628) 7.029,11.474 cw(c6.843,6.828) 6.658,2.181 cw(c6.835,6.628) 7.013,11.074 cw(c6.843,6.828) 6.674,2.581 cw(c6.835,6.628) 6.997,10.675 cw(c6.843,6.828) 6.69,2.981 cw(c6.835,6.628) 6.981,10.275 cw(c6.843,6.828) 6.706,3.38 cw(c6.835,6.628) 6.965,9.875 cw(c6.843,6.828) 6.722,3.78 cw(c6.835,6.628) 6.949,9.475 cw(c6.843,6.828) 6.738,4.18 cw(c6.835,6.628) 6.933,9.076 cw(c6.843,6.828) 6.754,4.579 cw(c6.835,6.628) 6.917,8.676 cw(c6.843,6.828) 6.77,4.979 cw(c6.835,6.628) 6.901,8.276 cw(c6.843,6.828) 8.186,7.376 8.186,7.286 cw(c7.456,7.286) v1(7.456,6.556)
  Bottom Layer w0.2: 5.532,15.234 4.316,14.462 ccw(c6.835,7.027) 7.149,-0.816 ccw(c6.843,6.828) 6.538,14.471 ccw(c6.835,7.027) 7.133,-0.417 ccw(c6.843,6.828) 6.554,14.072 ccw(c6.835,7.027) 7.117,-0.017 ccw(c6.843,6.828) 6.57,13.672 ccw(c6.835,7.027) 7.101,0.383 ccw(c6.843,6.828) 6.586,13.272 ccw(c6.835,7.027) 7.085,0.782 ccw(c6.843,6.828) 6.602,12.873 ccw(c6.835,7.027) 7.069,1.182 ccw(c6.843,6.828) 6.618,12.473 ccw(c6.835,7.027) 7.053,1.582 ccw(c6.843,6.828) 6.634,12.073 ccw(c6.835,7.027) 7.037,1.981 ccw(c6.843,6.828) 6.65,11.674 ccw(c6.835,7.027) 7.021,2.381 ccw(c6.843,6.828) 6.666,11.274 ccw(c6.835,7.027) 7.005,2.781 ccw(c6.843,6.828) 6.682,10.874 ccw(c6.835,7.027) 6.989,3.181 ccw(c6.843,6.828) 6.698,10.475 ccw(c6.835,7.027) 6.973,3.58 ccw(c6.843,6.828) 6.714,10.075 ccw(c6.835,7.027) 6.957,3.98 ccw(c6.843,6.828) 6.73,9.675 ccw(c6.835,7.027) 6.941,4.38 ccw(c6.843,6.828) 6.746,9.276 ccw(c6.835,7.027) 6.925,4.779 ccw(c6.843,6.828) 6.762,8.876 ccw(c6.835,7.027) 6.909,5.179 ccw(c6.843,6.828) 6.778,8.476 ccw(c6.835,7.027) 6.893,5.579 ccw(c6.893,6.142) 7.456,6.142 v1(7.456,6.556) ; 8.326,15.234 8.326,15.2 8.536,14.99 8.57,14.99 8.66,14.9 v1(9.396,14.9)
  Bottom Layer w1: -2.72,13.713 cw(c0,13.713) 0,16.433

## Polygon pours and split planes (outlines as drawn)
GND on Top Layer "NONET_L-01_P-001" (solid, remove dead copper, pour order 0): -4.5,21.34 -4.5,18.354 -4.5,-4.627 18.213,-4.627 18.34,-4.5 18.34,21.303
GND on Mid-Layer 7 "NONET_L-01_P-001" (solid, remove dead copper, pour order 5): -4.5,21.33 -4.5,18.354 -4.5,-4.627 18.213,-4.627 18.34,-4.5 18.34,21.303
GND on Bottom Layer "NONET_L-01_P-001" (solid, remove dead copper, pour order 1): -4.463,21.303 -4.5,18.354 -4.5,-4.627 18.213,-4.627 18.34,-4.5 18.34,21.303
GND on Mid-Layer 2 "NONET_L-01_P-001" (solid, remove dead copper, pour order 9): -4.5,21.34 -4.5,18.354 -4.5,-4.627 18.213,-4.627 18.34,-4.5 18.34,21.303
GND on Mid-Layer 10 "NONET_L-01_P-001" (solid, remove dead copper, pour order 2): -4.5,21.34 -4.5,18.354 -4.5,-4.627 18.213,-4.627 18.34,-4.5 18.34,21.314
GND on Mid-Layer 1 "NONET_L-01_P-001" (solid, remove dead copper, pour order 10): -4.474,21.314 -4.5,18.354 -4.5,-4.627 18.213,-4.627 18.34,-4.5 18.34,21.314
GND on Mid-Layer 9 "NONET_L-01_P-001" (solid, remove dead copper, pour order 3): -4.463,21.303 -4.5,18.354 -4.5,-4.627 18.213,-4.627 18.34,-4.5 18.34,21.303
GND on Mid-Layer 6 "NONET_L-01_P-001" (solid, remove dead copper, pour order 6): -4.5,21.34 -4.5,18.354 -4.5,-4.627 18.213,-4.627 18.34,-4.5 18.34,21.303
GND on Mid-Layer 4 "NONET_L-01_P-001" (solid, remove dead copper, pour order 8): -4.5,21.34 -4.5,18.354 -4.5,-4.627 18.213,-4.627 18.34,-4.5 18.34,21.314
GND on Mid-Layer 3 "NONET_L-01_P-001" (solid, remove dead copper, pour order 11): -4.5,21.33 -4.5,18.354 -4.5,-4.627 18.213,-4.627 18.34,-4.5 18.34,21.314
GND on Mid-Layer 5 "NONET_L-01_P-001" (solid, remove dead copper, pour order 7): -4.5,21.33 -4.5,18.354 -4.5,-4.627 18.213,-4.627 18.34,-4.5 18.34,21.314
GND on Mid-Layer 8 "NONET_L-01_P-001" (solid, remove dead copper, pour order 4): -4.5,21.34 -4.5,18.354 -4.5,-4.627 18.213,-4.627 18.34,-4.5 18.34,21.303

## Keep-outs
Keep-Out Layer:
  the board outline again, w0.01

## Other copper
Top Layer:
  rectangle net GND: 9.1,16.676 9.922,21.146
  rectangle net GND: 3.82,20.221 9.922,21.146
  rectangle net GND: 3.82,16.265 4.411,21.146
  rectangle net GND: -3.218,-0.508 -2.032,13.85
  rectangle net GND: -0.44,15.835 4.289,17.021
  rectangle net GND: -0.254,-3.251 13.978,-2.286
  rectangle net GND: 16.002,-0.254 16.958,14.001
  rectangle net GND: 9.062,15.494 14.224,17.005
Bottom Layer:
  rectangle net GND: 9.494,16.891 9.906,20.725
  rectangle net GND: 3.81,20.49 9.908,21.128
  rectangle net GND: 3.81,16.821 4.419,21.128
  rectangle net GND: -0.381,15.748 4.318,16.985
  rectangle net GND: -3.236,-0.287 -2.286,14.224
  rectangle net GND: -0.381,-3.238 13.929,-2.413
  rectangle net GND: 16.002,-0.381 16.956,13.951
  rectangle net GND: 9.271,15.621 13.97,16.96

## Silkscreen, mask and mechanical layers (free items; w line width, h text height)
Top Overlay:
  text "flexar" at 9.937,-1.162 h2 r180
Bottom Overlay:
  lines w0.2: 4.767,17.613 4.119,17.613 4.119,20.822 9.553,20.822 9.553,17.613 8.905,17.613 ; 6.332,17.613 7.328,17.613 ; 6.866,17.613 6.866,20.822
  text "flexar" at 3.841,-1.162 h2 r180
Top Solder:
  region: 3.56,-1.151 -0.193,-1.151 -0.193,-3.172 3.56,-3.172
  region: 13.713,-1.067 10.148,-1.067 10.148,-3.212 13.713,-3.212
  rectangle: -3.17,0.121 -1.453,13.964
  rectangle: 0,15.107 3.812,16.884
  rectangle: 9.89,14.864 13.906,16.885
  rectangle: 15.567,-0.252 16.882,13.964
  lines w1.8: -2.162,5.832 ccw(c6.856,6.892) 2.661,-1.161 ; -1.402,3.047 cw(c6.856,6.821) 2.905,14.996 ; 10.795,15.003 cw(c6.856,6.821) 15.874,7.881 ; 11.052,-1.161 ccw(c6.856,6.892) 15.115,10.666
  lines w2.2: -1.083,1.769 ccw(c0,0) 1.783,-1.06 ; -1.07,11.936 cw(c0,13.713) 1.819,14.71 ; 11.894,-0.997 ccw(c13.713,0) 14.783,1.777 ; 11.93,14.773 cw(c13.713,13.713) 14.796,11.943
Bottom Solder:
  rectangle: -3.17,0.121 -1.453,13.964
  rectangle: 0,15.107 3.812,16.884
  rectangle: 9.89,14.864 13.906,16.885
  rectangle: 15.567,-0.252 16.882,13.964
  region: 13.713,-1.067 10.148,-1.067 10.148,-3.212 13.713,-3.212
  region: 3.56,-1.151 -0.193,-1.151 -0.193,-3.172 3.56,-3.172
  rectangle: 0,15.107 3.812,16.884
  rectangle: -3.17,0.121 -1.453,13.964
  rectangle: 15.567,-0.252 16.882,13.964
  rectangle: 9.89,14.864 13.906,16.885
  lines w1.8: -2.162,5.832 ccw(c6.856,6.892) 2.661,-1.161 ; -1.402,3.047 cw(c6.856,6.821) 2.905,14.996 ; 10.795,15.003 cw(c6.856,6.821) 15.874,7.881 ; 11.052,-1.161 ccw(c6.856,6.892) 15.115,10.666
  lines w2.2: -1.365,1.562 ccw(c0,0) 1.784,-1.059 ; -1.083,1.769 ccw(c0,0) 1.783,-1.06 ; 11.894,-0.997 ccw(c13.713,0) 14.783,1.777 ; 11.934,-1.067 ccw(c13.713,0) 15.025,1.606 ; -1.07,11.936 cw(c0,13.713) 1.819,14.71 ccw(c0,13.713) -1.07,11.936 ; 11.93,14.773 cw(c13.713,13.713) 14.796,11.943 ccw(c13.713,13.713) 11.93,14.773
Mechanical 1:
  the board outline again, w0.254
Mechanical 4:
  lines w0.254: 21.521,41.498 60.637,41.498 60.637,57.906 21.521,57.906 21.521,41.498
  text "Layers: 12 / Finish Copper: 2oz / Inner Copper: 2oz / Soldermask: Matte black / Temperature Rating, Tg: 170°C" at 22.637,42.895 h3